# Altium PCB PEAK_PDB.PcbDoc
Units mil, origin at the board's own origin, x right, y up, seen from the top; angles counter-clockwise.
Board outline 3000 x 3300 mil, 4 copper layers (Top Layer, Layer 1 (GND), Layer 2 (Vcc), Bottom Layer), stack 23.756 mil thick; 74 components, 66 nets, 244 pads, 46 vias.
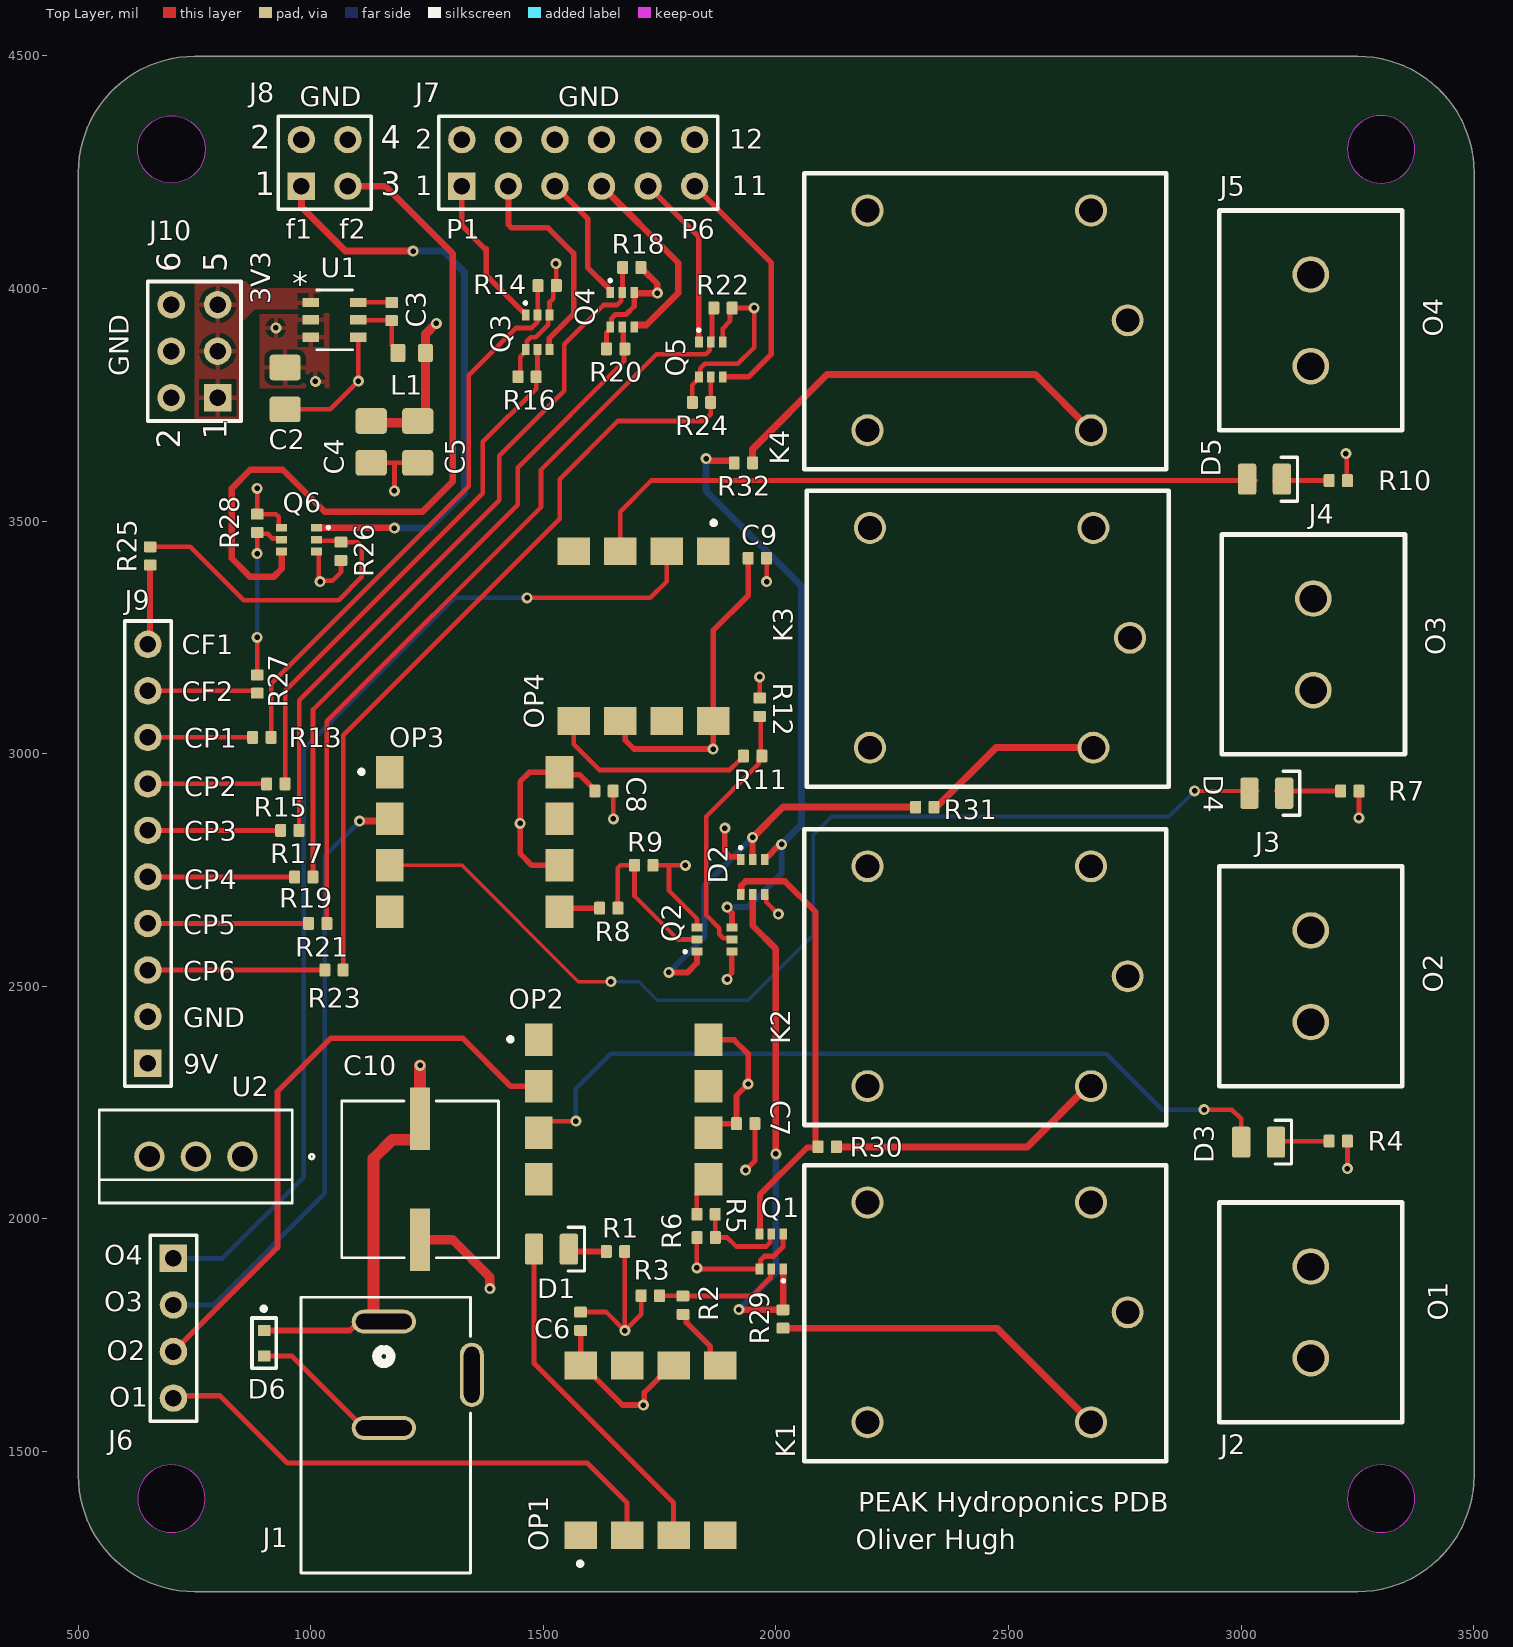
[diagram p0: Top Layer view]
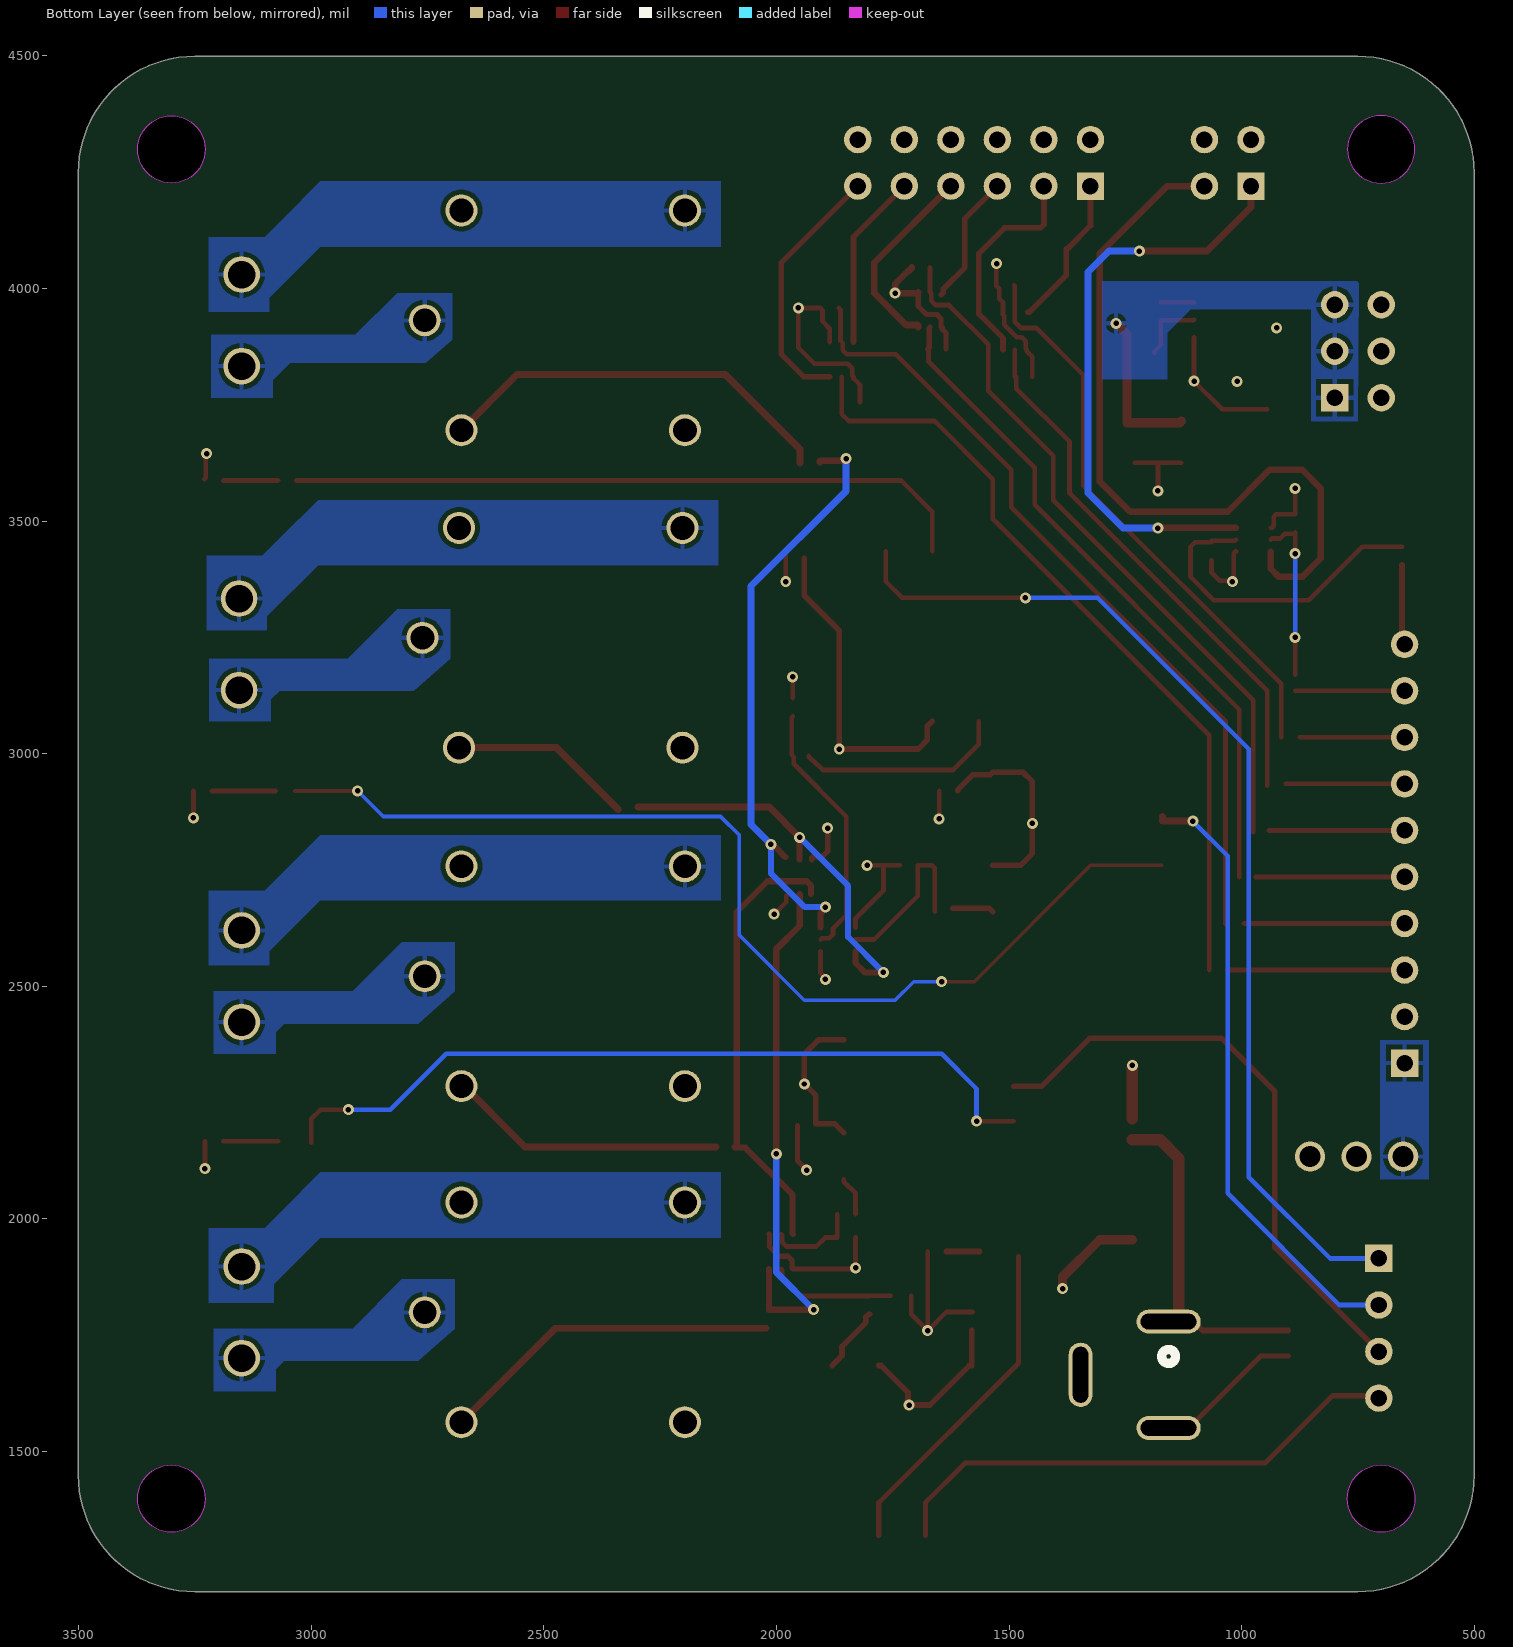
[diagram p1: Bottom Layer view, seen from below]
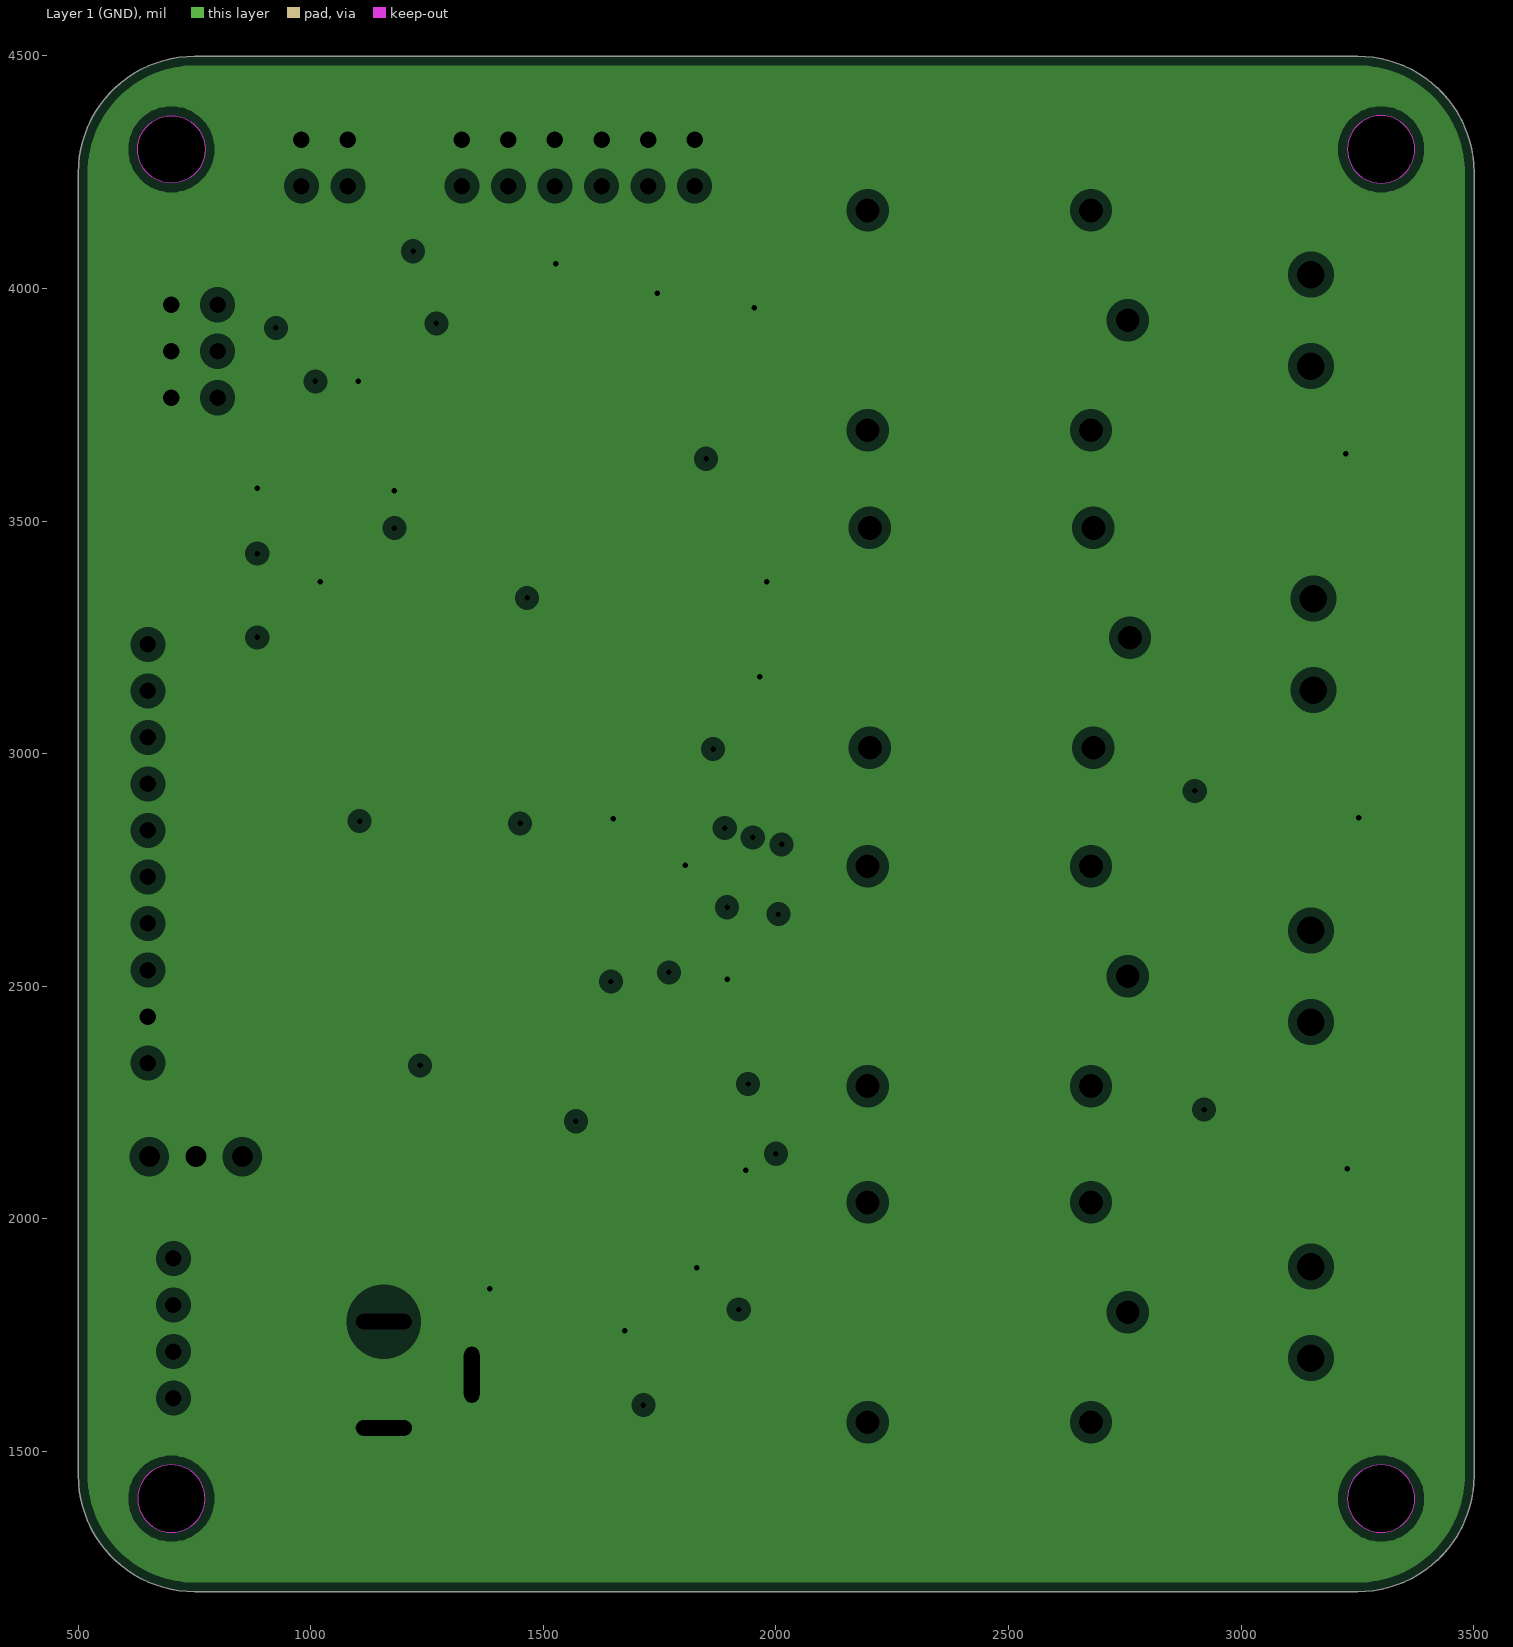
[diagram p2: Layer 1 (GND), clearances drawn from the general rule]
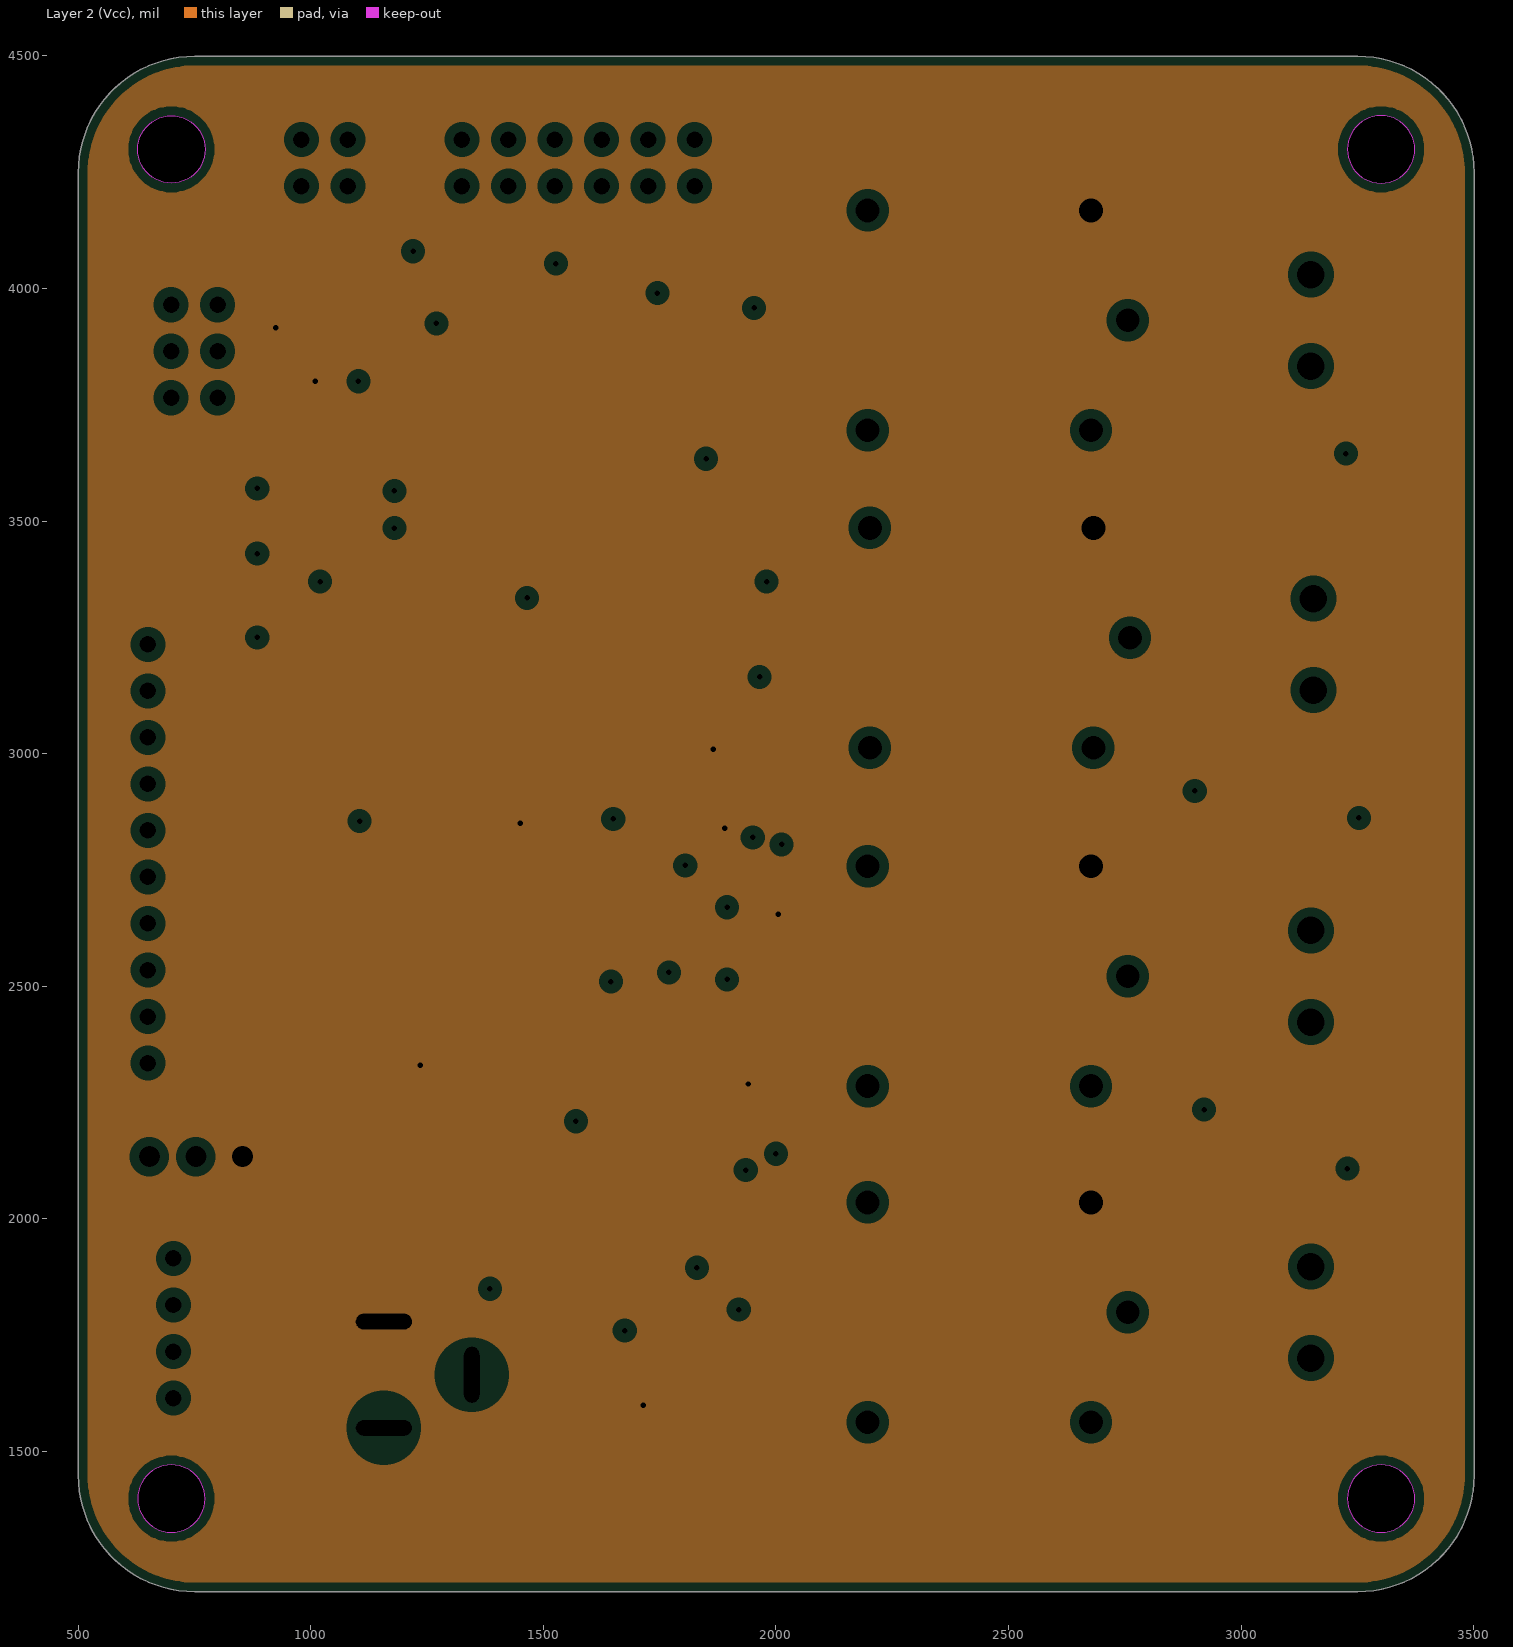
[diagram p3: Layer 2 (Vcc), clearances drawn from the general rule]
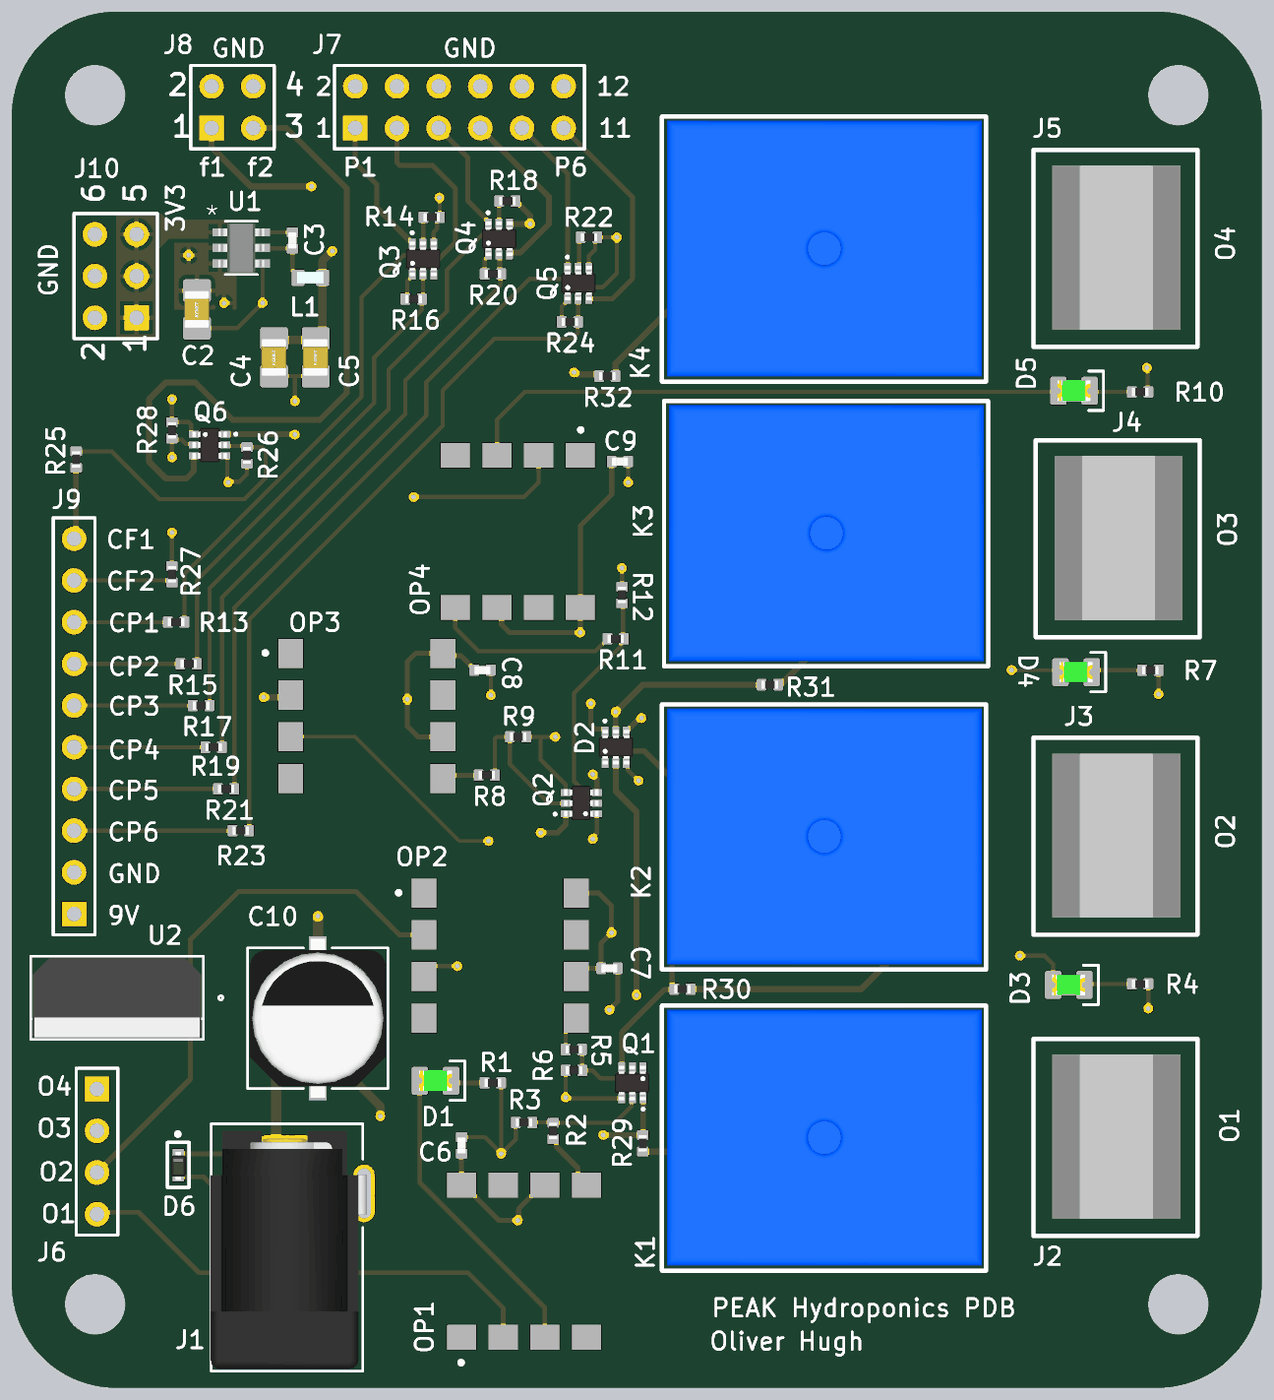
[diagram p4: 3D render of the assembled board from above, using the file's embedded part models]

## Layer stack, top to bottom
Top Solder: solder mask 0.4, Solder Resist, Dk 3.5
Top Layer: signal copper 1.4
Dielectric 2: prepreg 2.8, PP-006, Dk 4.1
Layer 1 (GND): plane copper 1.378, net GND
Dielectric 1: dielectric 12.6, FR-4, Dk 4.8
Layer 2 (Vcc): plane copper 1.378, net +12VDC
Dielectric 3: prepreg 2.8, PP-006, Dk 4.1
Bottom Layer: signal copper 1.4
Bottom Solder: solder mask 0.4, Solder Resist, Dk 3.5

## Board outline
500.5,1448.84 ccw(c750.5,1448.84) 750.5,1198.84 3250.5,1198.84 ccw(c3250.5,1448.84) 3500.5,1448.84 3500.5,4248.84 ccw(c3250.5,4248.84) 3250.5,4498.84 750.5,4498.84 ccw(c750.5,4248.84) 500.5,4248.84
cut-out: 628,1398.84 ccw(c700.5,1398.84) 700.5,1326.34 ccw(c700.5,1398.84) 773,1398.84 ccw(c700.5,1398.84) 700.5,1471.34 ccw(c700.5,1398.84)
cut-out: 3228,1398.84 ccw(c3300.5,1398.84) 3300.5,1326.34 ccw(c3300.5,1398.84) 3373,1398.84 ccw(c3300.5,1398.84) 3300.5,1471.34 ccw(c3300.5,1398.84)
cut-out: 3228,4298.84 ccw(c3300.5,4298.84) 3300.5,4226.34 ccw(c3300.5,4298.84) 3373,4298.84 ccw(c3300.5,4298.84) 3300.5,4371.34 ccw(c3300.5,4298.84)
cut-out: 700.5,4226.34 cw(c700.5,4298.84) 628,4298.84 cw(c700.5,4298.84) 700.5,4371.34 cw(c700.5,4298.84) 773,4298.84 cw(c700.5,4298.84)

## Design rules (kind name [scope] priority, off if disabled: settings)
Clearance [All] p1: gap=10 ignorepadtopadclearanceinfootprint=FALSE except(0: Arc-Hole Track-Hole SMDPad-Hole THPad-Hole Via-Hole Fill-Hole Poly-Hole Region-Hole Text-Hole; 5.04: SMDPad-SMDPad; 5.51: Arc-Arc Arc-Track Track-Track; 7.09: SMDPad-Text; 9.84: Arc-SMDPad Track-SMDPad; 10.04: Arc-Via Track-Via; 13.78: Arc-THPad Track-THPad; 21.65: THPad-THPad)
HoleSize [All] p1: absolutevalues=TRUE maxlimit=248.03 minlimit=1 maxpercent=80.000 minpercent=20.000
MinimumSolderMaskSliver [All] p1: minsoldermaskwidth=4.33
PlaneClearance [All] p1: clearance=20
PlaneConnect [All] p1: planeconnectstyle=Relief reliefexpansion=20 reliefentries=4 reliefconductorwidth=10 reliefairgap=10
PolygonConnect [All] p1: connectstyle=Relief reliefconductorwidth=10 reliefentries=4 polygonreliefangle="90 Angle" airgapwidth=10
RoutingVias [All] p1: holewidth=11.81 width=15.75 viastyle="Through Hole" minholewidth=7.87 minwidth=9.84 maxholewidth=248.03 maxwidth=50
SilkToSolderMaskClearance [IsPad] p1: minsilkscreentomaskgap=5.91 clearancetoexposedcopper=TRUE
SolderMaskExpansion [All] p1: expansion=1.77 istentingtop=FALSE
Width [All] p1: maxlimit=30 minlimit=5.5 preferedwidth=10
25 further rules are at their usual default settings.

## Classes and differential pairs
component class DC_Power_Regulation: C2 C3 C4 C5 C10 D6 J1 J7 J8 J9 J10 L1 Q3 Q4 Q5 Q6 R13 R14 R15 R16 R17 R18 R19 R20 R21 R22 R23 R24 R25 R26 R27 R28 U1 U2
component class AC_Power_Management: C6 C7 C8 C9 D1 D2 D3 D4 D5 D? J2 J3 J4 J5 J6 K1 K2 K3 K4 OP1 OP2 OP3 OP4 Q1 Q2 R1 R2 R3 R4 R5 R6 R7 R8 R9 R10 R11 R12 R29 R30 R31 R32

## Components (designator, comment, footprint, x,y, rotation, side; value= is the part's Value field where it differs from the comment)
C2 "10u" CAP_0805 945,3785 r90 top
C3 "100n" CAP_0402 1174,3950.31 r90 top
C4 "22u" CAP_0805 1130,3670 r90 top
C5 "22u" CAP_0805 1230,3670 r90 top
C6 "100n" CAP_0402 1580,1780 r90 top
C7 "100n" CAP_0402 1934.84,2204.84 r0 top
C8 "100n" CAP_0402 1630.31,2920 r0 top
C9 "100n" CAP_0402 1960,3420 r0 top
C10 "100u" CAP_EEH-ZA1V151P_PAN 1235,2085 r90 top
D1 "GREEN" LED_0805_GREEN 1517.4,1935 r180 top
D2 "BAT54CDW-7-F" SOT-363 1950,2735 r0 top
D3 "GREEN" LED_0805_GREEN 3037.4,2165 r180 top
D4 "GREEN" LED_0805_GREEN 3055,2915 r180 top
D5 "GREEN" LED_0805_GREEN 3050,3590 r180 top
D6 "15Vrwm" SOD523 900,1760.12 r270 top
J1 "694106301002" 694106301002 1230,1665 r90 top
J2 "Terminal Block" 25-E400-02 3149.61,1799.21 r270 top
J3 "Terminal Block" 25-E400-02 3149.61,2521.61 r270 top
J4 "Terminal Block" 25-E400-02 3155,3235 r270 top
J5 "Terminal Block" 25-E400-02 3149.61,3931.42 r270 top
J6 "Header 4" HDR1X4 705,1915 r270 top
J7 "Header 6X2" HDR2X6 1325,4220 r0 top
J8 "Header 2X2" HDR2X2 980,4220 r0 top
J9 "Header 10" HDR1X10 650,2335 r90 top
J10 "Header 3X2" HDR2X3 800,3765 r90 top
K1 "SRD-12VDC-S L-A" "SRD-12VDC-S L" 2196.85,2035.43 r0 top
K2 "SRD-12VDC-S L-A" "SRD-12VDC-S L" 2196.85,2757.83 r0 top
K3 "SRD-12VDC-S L-A" "SRD-12VDC-S L" 2201.85,3485.24 r0 top
K4 "SRD-12VDC-S L-A" "SRD-12VDC-S L" 2196.85,4167.64 r0 top
L1 "4u7" IND_0603 1217,3861 r0 top
OP1 "6N136SMT/R" SOP-8-2.54MM 1580,1320 r90 top
OP2 "6N136SMT/R" SOP-8-2.54MM 1490.04,2385 r0 top
OP3 "6N136SMT/R" SOP-8-2.54MM 1170,2960 r0 top
OP4 "6N136SMT/R" SOP-8-2.54MM 1865,3435 r270 top
Q1 "NTJD5121NT1G" SOT-363 1990,1930 r180 top
Q2 "NTJD5121NT1G" SOT-363 1867.6,2600.59 r90 top
Q3 "NTJD5121NT1G" SOT-363 1487.49,3905.75 r0 top
Q4 "NTJD5121NT1G" SOT-363 1669.67,3953.97 r0 top
Q5 "NTJD5121NT1G" SOT-363 1860,3847.4 r0 top
Q6 "NTJD5121NT1G" SOT-363 975,3460 r270 top
R1 "50R" RES_0402 1655,1930 r180 top
R2 "1k" RES_0402 1800,1814.69 r90 top
R3 "10k" RES_0402 1730,1835 r0 top
R4 "50R" RES_0402 3208.66,2167.28 r180 top
R5 "1k" RES_0402 1849.69,2010 r0 top
R6 "10k" RES_0402 1850,1960 r0 top
R7 "50R" RES_0402 3233.35,2919.69 r180 top
R8 "1k" RES_0402 1640.63,2668.03 r0 top
R9 "10k" RES_0402 1715.63,2760 r180 top
R10 "50R" RES_0402 3208.66,3587.09 r180 top
R11 "1k" RES_0402 1950,2995 r0 top
R12 "10k" RES_0402 1965,3100 r270 top
R13 "1k" RES_0402 895,3035 r0 top
R14 "10k" RES_0402 1508.21,4006.15 r180 top
R15 "1k" RES_0402 925,2935 r0 top
R16 "10k" RES_0402 1465,3810 r0 top
R17 "1k" RES_0402 955,2835 r0 top
R18 "10k" RES_0402 1690,4045 r180 top
R19 "1k" RES_0402 985,2735 r0 top
R20 "10k" RES_0402 1655.31,3870 r0 top
R21 "1k" RES_0402 1015,2635 r0 top
R22 "10k" RES_0402 1886,3958 r180 top
R23 "1k" RES_0402 1050,2535 r0 top
R24 "10k" RES_0402 1840,3755 r0 top
R25 "1k" RES_0402 655,3425 r90 top
R26 "10k" RES_0402 1065,3435 r90 top
R27 "1k" RES_0402 885,3149.69 r90 top
R28 "10k" RES_0402 885,3495 r270 top
R29 "0R" RES_0402 2015,1785 r270 top
R30 "0R" RES_0402 2110,2155 r0 top
R31 "0R" RES_0402 2320,2885 r0 top
R32 "0R" RES_0402 1930,3625 r0 top
U1 "3.3V Switch Reg" AP63203WU-7 1051.25,3932.4 r0 top
U2 "9V Lin Reg 1A" MC7809CTG 753,2134 r180 top

## Footprints (in the part's own frame and the unit in brackets; to place one, negate y for a bottom-side part, rotate by r counter-clockwise, add the part's x,y. Pads: shape width x height; smd on the part's side, far side on the other; paste and mask are expansions set on the pad)
25-E400-02 [mm] "NTE Electronics, Inc TERMINAL BLOCK EUROSTYLE2 Position Wire to Board Terminal Block Horizontal with Board 0.197\" (5.00mm) Through Hole"
  round 2 hole 1.5: 1(-2.5,0) 2(2.5,0)
  silkscreen extent -6,-5 6,5, body extent -5.04,-3.85 4.97,3.95, height 10.02
694106301002 [mm] "CONN PWR JACK 2.1X5.5MM SOLDER"
  oval 1.308x3.508 hole 0.85 slot 3.05 at 90 deg: 1(2.9,1.85) 2(-2.9,1.85)
  oval 3.508x1.308 hole 0.85 slot 3.05 at 0 deg: 3(0,-2.95)
  silkscreen extent -10.83,-2.87 4.24,6.37, body extent -10.69,-3.1 3.81,6.4, height 10.71
AP63203WU-7 [mil]
  rect 35.5x20 smd paste+0 mask+0: 1(-51.25,37.4) 2(-51.25,0) 3(-51.25,-37.4) 4(51.25,-37.4) 5(51.25,0) 6(51.25,37.4)
  silkscreen extent -38,-64 38,64, body extent -55,-59 55,59, height 39
CAP_0402 [mm]
  rrect25% 0.6x0.7 smd: 1(-0.5,0) 2(0.5,0)
  body extent -0.5,-0.26 0.5,0.26, height 0.37
CAP_0805 [mm]
  rrect25% 1.4x1.7 smd: 1(-1.143,0) 2(1.143,0)
  body extent -1.15,-0.76 1.15,0.79, height 1.01
CAP_EEH-ZA1V151P_PAN [mil]
  rect 134x43 smd paste+0 mask+0: 1(-130,0) 2(130,0)
  silkscreen extent -168,-168 168,168, body extent -191,-163 191,163, height 402
HDR1X4 [mm] "Connector; Header; 4 Position"
  rect 1.5x1.5 hole 0.9: 1(0,0)
  round 1.5 hole 0.9: 2(2.54,0) 3(5.08,0) 4(7.62,0)
  silkscreen extent -1.27,-1.27 8.89,1.27
HDR1X10 [mm] "Connector; Header; 10 Position"
  rect 1.5x1.5 hole 0.9: 1(0,0)
  round 1.5 hole 0.9: 2(2.54,0) 3(5.08,0) 4(7.62,0) 5(10.16,0) 6(12.7,0) 7(15.24,0) 8(17.78,0) 9(20.32,0) 10(22.86,0)
  silkscreen extent -1.27,-1.27 24.13,1.27
HDR2X2 [mm] "Connector; Header; 2x2 Position"
  rect 1.5x1.5 hole 0.9: 1(0,0)
  round 1.5 hole 0.9: 2(0,2.54) 3(2.54,0) 4(2.54,2.54)
  silkscreen extent -1.27,-1.27 3.81,3.81
HDR2X3 [mm] "Connector; Header; 3x2 Position"
  rect 1.5x1.5 hole 0.9: 1(0,0)
  round 1.5 hole 0.9: 2(0,2.54) 3(2.54,0) 4(2.54,2.54) 5(5.08,0) 6(5.08,2.54)
  silkscreen extent -1.27,-1.27 6.35,3.81
HDR2X6 [mm] "Connector; Header; 6x2 Position"
  rect 1.5x1.5 hole 0.9: 1(0,0)
  round 1.5 hole 0.9: 2(0,2.54) 3(2.54,0) 4(2.54,2.54) 5(5.08,0) 6(5.08,2.54) 7(7.62,0) 8(7.62,2.54) 9(10.16,0) 10(10.16,2.54) 11(12.7,0) 12(12.7,2.54)
  silkscreen extent -1.27,-1.27 13.97,3.81
IND_0603 [mm]
  rrect25% 0.8x1 smd: 1(-0.75,0) 2(0.75,0)
  body extent -0.81,-0.37 0.81,0.37, height 0.87
LED_0805_GREEN [mm]
  rrect25% 1x1.7 smd: A(0.95,0) K(-0.95,0)
  silkscreen extent -1.8,-1.2 -0.9,1.2, body extent -1,-0.63 1,0.63, height 1.12
MC7809CTG [mil] "IC REG LINEAR 9V 1A TO220AB"
  round 65 / inner round 60 / far side round 65 hole 45 paste-32.5 mask+0: 1(-100,0) 2(0,0) 3(100,0)
  silkscreen extent -254,-100 208,100, body extent -203,-95 203,95, height 665
RES_0402 [mm]
  rrect25% 0.6x0.7 smd: 1(-0.5,0) 2(0.5,0)
  body extent -0.5,-0.25 0.5,0.25, height 0.3
SOD523 [mm]
  rect 0.6x0.7 smd: 1(0,0) 2(1.4,0)
  silkscreen extent -1.3,-0.66 2.06,0.66, body extent -0.11,-0.44 1.59,0.46, height 0.7
SOP-8-2.54MM [mm]
  rect 1.52x1.78 smd mask+0.05: 1(0,0) 2(0,-2.54) 3(0,-5.08) 4(0,-7.62) 5(9.27,-7.62) 6(9.27,-5.08) 7(9.27,-2.54) 8(9.27,0)
  silkscreen extent -1.65,-0.08 -1.44,0.13, body extent -0.53,-8.74 9.77,1.02, height 4.31
SOT-363 [mm]
  rect 0.42x0.6 smd: 1(-0.65,0.95) 2(0,0.95) 3(0.65,0.95) 4(0.65,-0.95) 5(0,-0.95) 6(-0.65,-0.95)
  silkscreen extent -0.69,1.57 -0.64,1.63, body extent -1.04,-1.04 1.06,1.06, height 0.95
"SRD-12VDC-S L" [mm] "Mechanical Relay"
  round 1.75 hole 1.3: 1(0,0) 2(12.2,-12) 3(14.2,-6) 4(12.2,0) 5(0,-12)
  silkscreen extent -3.45,-14.12 16.31,2.03, body extent -3.15,-13.82 16.05,1.78, height 15.81

## Part data
C2 C4 C5: library part CAP_0805
C3 C6 C7 C8 C9: library part CAP_0402
C10: library part CAP_EEH-ZA1V151P_PAN
D1 D3 D4 D5: library part LED_0805_GREEN, "LED 0805 GREEN SMD"
D2: "2 Pairs of Common Cathode Diodes in SOT363 Package BAT54CDW-7-F"
D6: library part PESD15VS1UB,115, "ESD protection (TVS) diode in SOD523 package"
J1: library part "Header 3", "Header, 3-Pin", LatestRevisionDate=17-Jul-2002, LatestRevisionNote="Re-released for DXP Platform.", Publisher="Altium Limited"
J2 J3 J4 J5: library part "Header 2", "Header, 2-Pin", LatestRevisionDate=17-Jul-2002, LatestRevisionNote="Re-released for DXP Platform.", Publisher="Altium Limited"
J6: "Header, 4-Pin", LatestRevisionDate=17-Jul-2002, LatestRevisionNote="Re-released for DXP Platform.", Publisher="Altium Limited"
J7: "Header, 6-Pin, Dual row", LatestRevisionDate=17-Jul-2002, LatestRevisionNote="Re-released for DXP Platform.", Publisher="Altium Limited"
J8: "Header, 2-Pin, Dual row", LatestRevisionDate=17-Jul-2002, LatestRevisionNote="Re-released for DXP Platform.", Publisher="Altium Limited"
J9: "Header, 10-Pin", LatestRevisionDate=17-Jul-2002, LatestRevisionNote="Re-released for DXP Platform.", Publisher="Altium Limited"
J10: "Header, 3-Pin, Dual row", LatestRevisionDate=17-Jul-2002, LatestRevisionNote="Re-released for DXP Platform.", Publisher="Altium Limited"
L1: library part IND_0603, "Inductor SMD 0603"
OP1 OP2 OP3 OP4: "Optocouplers SMD-8 RoHS. SOP-8-2.54mm Package"
Q1 Q2 Q3 Q4 Q5 Q6: "2 NMOSFETs SOT-363"
R1 R2 R3 R4 R5 R6 R7 R8 R9 R10 R11 R12 R13 R14 R15 R16 R17 R18 R19 R20 R21 R22 R23 R24 R25 R26 R27 R28 R29 R30 R31 R32: library part RES_0402, "Resistor SMD 0402 (0.0625W)"
U1: library part AP63203WU-7, "IC REG BUCK 3.3V 2A TSOT23-6"
U2: library part MC7809CTG, "IC REG LINEAR 9V 1A TO220AB"

## Via types
v1: diameter 23.62, hole 11.81, Top Layer to Bottom Layer, 46 vias

## Nets (pads, with @x,y where several pads share a name; then routed paths per layer and width w, separated by ;. In a path a pad name is that pad's centre, name@x,y a point inside that pad or via, vN(x,y) a via of type N, cw(c..) or ccw(c..) an arc to the next point about the centre after c; other vN are vias at no path point)
3V3: C4.2 C5.2 J10.1 J10.3 J10.5 L1.2 U1.1 | length 341.2
  Top Layer w20: C4.2 1133.47,3711.53 1246.53,3711.53 L1.2 1246.53,3901.53 v1(1270,3925)
+9VDC: J9.1 U2.3
+12VDC: C2.2 C6.1 C7.1 C8.1 C9.1 C10.2 D2.1 D2.4 D6.1 J1.1 K1.4 K2.4 K3.4 K4.4 OP1.6 OP1.8 OP2.6 OP2.8 OP3.6 OP3.8 OP4.6 OP4.8 U1.2 U1.3 U2.1 | length 2756.2
  Top Layer w10: D2.4@1978.86,2694.33 1978.86,2681.14 v1(2005,2655)
  Top Layer w12: D6.1 1084.12,1760.12 J1.1@1103.17,1779.17 ; OP3.6 1475,2760 1450,2785 v1(1450,2850) 1450,2940 1470,2960 OP3.8 1540.08,2954.88 1577.72,2954.88 1610.63,2921.97 C8.1 ; C6.1 OP1.8 1585.12,1684.96 1670.08,1600 v1(1715,1600) 1717.22,1602.22 1717.22,1627.3 1774.88,1684.96 OP1.6 ; OP4.6 1675.85,3059.19 1675.85,3029.15 1695,3010 v1(1865,3010) OP4.8 1865,3265 1940.31,3340.31 C9.1 ; OP2.6 1874.84,2204.84 C7.1 1915.16,2265.16 v1(1940,2290) 1940,2355 1910,2385 OP2.8 ; v1(1890,2840) 1890,2790 1901.79,2778.21 1922.14,2778.21 1924.41,2775.94 D2.1
  Top Layer w25: J1.1 1153.24,1779.17 1135,1797.42 1135,2130 1175,2170 C10.2@1235,2170 ; C10.2 v1(1235,2330)
  other v1: 1010,3800 925,3915
AC_Load1_In: J2.1 K1.1
AC_Load1_Out: J2.2 K1.3
AC_Load2_In: J3.1 K2.1
AC_Load2_Out: J3.2 K2.3
AC_Load3_In: J4.1 K3.1
AC_Load3_Out: J4.2 K3.3
AC_Load4_In: J5.1 K4.1
AC_Load4_Out: J5.2 K4.3
ds_fan1: J9.10 R25.1 | length 175.3
  Top Layer w13: J9.10@655,3230 R25.1
ds_fan2: J9.9 R27.1 | length 235
  Top Layer w10: J9.9 R27.1@885,3135
ds_pp1: J9.8 R13.1 | length 225
  Top Layer w10: J9.8 R13.1@875,3035
ds_pp2: J9.7 R15.1 | length 255
  Top Layer w10: J9.7 R15.1@905,2935
ds_pp3: J9.6 R17.1 | length 291.5
  Top Layer w10: J9.6 R17.1@941.51,2835
ds_pp4: J9.5 R19.1 | length 320
  Top Layer w10: J9.5 R19.1 R19.1@970,2735
ds_pp5: J9.4 R21.1 | length 345
  Top Layer w10: J9.4 R21.1@995,2635
ds_pp6: J9.3 R23.1 | length 380
  Top Layer w10: J9.3 R23.1@1030,2535
fan1+: J8.1 Q6.1 | length 1276.9
  Top Layer w14: Q6.1 1012.7,3485.3 1179.7,3485.3 v1(1180,3485)
  Top Layer w15: J8.1 980,4175 1075,4080 v1(1220,4080)
  Bottom Layer w15: v1(1180,3485) 1255,3485 1330,3560 1330,4035 1285,4080 v1(1220,4080)
fan2+: J8.3 Q6.4 | length 1649.1
  Top Layer w14: Q6.4 937.6,3397.6 920,3380 870,3380 830,3420 830,3570 870,3610 940,3610 1030,3520 1240,3520 1305,3585 1305,4075 1160,4220 J8.3
GND: C2.1 C4.1 C5.1 C6.2 C7.2 C8.2 C9.2 C10.1 D6.2 J1.2 J1.3 J7.2 J7.4 J7.6 J7.8 J7.10 J7.12 J8.2 J8.4 J9.2 J10.2 J10.4 J10.6 Q1.3 Q1.6 Q2.3 Q2.6 Q3.3 Q3.6 Q4.3 Q4.6 Q5.3 Q5.6 Q6.3 Q6.6 R1.1 R3.1 R4.1 R6.1 R7.1 R9.1 R10.1 R12.1 R14.1 R16.1 R18.1 R20.1 R22.1 R24.1 R26.1 R28.1 U1.4 U2.2 | length 3639.7
  Top Layer w10: v1(885,3570) R28.1 925.28,3514.69 931.14,3508.83 931.14,3488.86 934.41,3485.59 Q6.6 ; C2.1 1042,3740 v1(1102.5,3800.5) U1.4 ; Q6.3 1014.13,3434.41 1017.39,3431.14 1017.39,3372.61 v1(1020,3370) 1021.81,3371.81 1046.81,3371.81 1065,3390 R26.1 ; C4.1 1180,3625 ; v1(1180,3565) 1180,3625 ; C5.1 1180,3625 ; R16.1@1450,3810 1450,3852.9 1461.9,3864.8 Q3.6 1464.38,3870.83 1464.38,3886.31 1473.07,3895 1483.28,3895 1510.6,3922.32 1510.6,3940.67 Q3.3 1513.08,3969.96 1521.09,3977.97 1521.09,3999.34 R14.1 1527.4,4006.65 1527.4,4052.65 v1(1526.9,4053.15) ; C6.2@1577.89,1800 1635,1800 v1(1675,1760) ; v1@1650.16,2860.16 C8.2@1650.16,2919.84 ; R1.1@1675,1930 v1(1675,1760) ; R3.1 1710.31,1795.31 v1(1675,1760) ; R9.1 1770,2760 ; v1(1805,2760) 1770,2760 ; R24.1 1820.31,3792.36 1834.41,3806.46 Q5.6 1836.89,3812.48 1836.89,3827.96 1847.08,3838.15 1918.15,3838.15 1953,3873 v1(1953,3958) R22.1 1901.04,3953.35 1901.04,3929.22 1885.59,3913.78 Q5.3 ; v1(1830,1895) R6.1@1830,1960 ; Q2.3 1830.2,2644.8 1770,2705 1770,2760 ; R12.1 v1(1965,3165) ; v1@1980,3375.42 C9.2@1980,3425.42 ; v1(3225,3645) 3226.67,3643.33 3226.67,3593.33 R10.1@3230,3590 ; v1(3228.35,2108.35) R4.1 ; v1(3253.03,2861.97) R7.1
  Top Layer w11: D6.2 959.69,1705 1113.86,1550.83 J1.2 ; R20.1 1635.63,3904.57 1644.08,3913.02 Q4.6 ; Q4.6@1645.56,3918.04 1646.06,3918.54 1646.06,3934.73 1655.05,3943.72 1677.42,3943.72 1695.26,3961.56 1695.26,3991.27 Q4.3 ; v1@1830,1892.6 Q1.3 1966.39,1894.58 1966.39,1910.76 1975.38,1919.75 1994.75,1919.75 2015,1940 2015,1966.81 Q1.6 ; v1(1895,2515) 1895,2518.42 1905,2528.42 Q2.6 ; v1(1935,2105) 1955,2125 C7.2@1955,2201.18
  Top Layer w12: Q4.6 Q4.6@1645.56,3918.04
  Top Layer w14: Q4.3@1695.26,3991.27 1696.53,3990 v1(1745,3990) 1744.68,3990.31 1744.68,4010.01 1716.46,4038.22 1714.5,4038.22 1709.69,4043.03 R18.1
  Top Layer w20: C10.1 1305,1955 1385,1875 v1@1385,1851.67
  other v1: 1385,1850 1650.31,2860 1980,3370
NetC3_1: C3.1 L1.1 U1.5 | length 147.4
  Top Layer w10: U1.5 1103.39,3931.52 1173.11,3931.52 C3.1 1174,3878.41 1187.47,3864.94 L1.1
NetC3_2: C3.2 U1.6 | length 71.6
  Top Layer w10: U1.6 1102.6,3969.9 1173.9,3969.9 C3.2
NetD1_A: D1.A OP1.3 | length 723.6
  Top Layer w11: D1.A@1480,1919.32 1480,1690 1780,1390 OP1.3
NetD1_K: D1.K R1.2 | length 72.3
  Top Layer w12: D1.K@1563.03,1930 R1.2
NetD2_2: D2.2 Q2.1 R31.1 | length 879.9
  Top Layer w13: v1(1770,2530) 1810,2530 1830,2550 1830,2574.8 Q2.1 ; D2.2 v1(1950,2820)
  Top Layer w15: v1(1950,2820) 2015,2885 R31.1@2297.41,2885
  Bottom Layer w13: v1(1770,2530) 1846,2606 1846,2716 v1(1950,2820)
NetD2_3: D2.3 Q2.4 R32.1 | length 1291.3
  Top Layer w13: v1(1895,2670) 1895,2667.13 1905,2657.13 Q2.4 ; D2.3@1980.9,2777.71 2006.16,2802.97 2009.97,2802.97 v1(2012,2805)
  Top Layer w15: v1(1850,3633.94) 1852.33,3633.94 1856.68,3629.59 1906,3629.59 R32.1@1906,3627.34
  Bottom Layer w13: v1(1895,2670) 1939,2670 2012,2743 v1(2012,2805)
  Bottom Layer w15: v1(1850,3633.94) 1850,3565 2055,3360 2055,2848 v1(2012,2805)
NetD2_5: D2.5 Q1.1 R29.1 | length 1129.5
  Top Layer w13: R29.1@2015.59,1804.69 Q1.1
  Top Layer w14: v1(1920,1805) 1920.16,1804.84 2014.84,1804.84 R29.1 ; D2.5 1950,2630 2000,2580 v1(2000,2140)
  Bottom Layer w14: v1(1920,1805) 2000,1885 v1(2000,2140)
NetD2_6: D2.6 Q1.4 R30.1 | length 966.1
  Top Layer w13: D2.6@1925.39,2698.58 1925.39,2716.18 1934.96,2725.75 2019.25,2725.75 2085.31,2659.68 R30.1@2085.31,2155 ; Q1.4 1965.39,1968.38 1965.39,2051.89 2066.69,2153.19 2088.51,2153.19 R30.1
NetD3_A: D3.A OP2.3 | length 1720.5
  Top Layer w10: OP2.3@1490,2210 v1(1570,2210) ; v1(2920,2235) 2980,2235 3000,2215 D3.A@3000,2163.58
  Bottom Layer w10: v1(1570,2210) 1570,2280 1645,2355 2710,2355 2830,2235 v1(2920,2235)
NetD3_K: D3.K R4.2 | length 118.1
  Top Layer w10: D3.K@3070.87,2167.28 R4.2
NetD4_A: D4.A OP3.3 | length 2295.3
  Top Layer w8: OP3.3@1172.45,2760 1325,2760 1575,2510 v1(1645,2510) ; v1(2900,2920) D4.A@3035.31,2920
  Bottom Layer w8: v1(1645,2510) 1705,2510 1745,2470 1940,2470 2080,2610 2080,2825 2120,2865 2845,2865 v1(2900,2920)
NetD4_K: D4.K R7.2 | length 137.8
  Top Layer w10: D4.K@3075.87,2919.69 R7.2
NetD5_A: D5.A OP4.3 | length 1479.3
  Top Layer w10: OP4.3 1665,3520 1732.09,3587.09 D5.A@3031.5,3587.09
NetD5_K: D5.K R10.2 | length 118.1
  Top Layer w10: D5.K@3070.87,3587.09 R10.2
NetK1_2: K1.2 R29.2 | length 737.9
  Top Layer w15: R29.2@2022.92,1765 2475.16,1765 K1.2
NetK2_2: K2.2 R30.2 | length 606.5
  Top Layer w15: R30.2 2540,2155 K2.2@2678.75,2293.75
NetK3_2: K3.2 R31.2 | length 397.2
  Top Layer w15: R31.2@2340,2880 2472.8,3012.8 K3.2
NetK4_2: K4.2 R32.2 | length 873.3
  Top Layer w15: R32.2@1949.37,3625 1949.37,3654.37 2110,3815 2557.36,3815 K4.2
NetOP1_5: OP1.5 R2.1 | length 144.3
  Top Layer w12: R2.1 1801.85,1795 1807.66,1789.19 1807.66,1777.34 1859.15,1725.85 1859.15,1705.81 OP1.5
NetOP2_5: OP2.5 R5.1 | length 85.4
  Top Layer w10: R5.1 1830,2054.88 1855,2079.88 OP2.5
NetOP3_5: OP3.5 R8.1 | length 89.3
  Top Layer w12: OP3.5 1542.99,2668.03 R8.1
NetOP4_5: OP4.5 R11.1 | length 451.7
  Top Layer w10: OP4.5 1565,3020 1620,2965 1900.31,2965 1921.54,2986.22 1923.5,2986.22 1930.31,2993.03 R11.1
Outlet1: J6.4 OP1.2 | length 1142.3
  Top Layer w11: J6.4 710,1620 805,1620 950,1475 1595,1475 1680,1390 OP1.2
Outlet2: J6.3 OP2.2 | length 1303.2
  Top Layer w12: J6.3 928.61,1938.61 928.61,2273.61 1043.61,2388.61 1326.39,2388.61 1430,2285 OP2.2
Outlet3: J6.2 OP3.2 | length 1330.6
  Top Layer w15: v1(1105,2855) 1169.88,2855 1170,2854.88 OP3.2@1170,2865
  Bottom Layer w10: J6.2 790,1815 1030,2055 1030,2780 v1(1105,2855)
Outlet4: J6.1 OP4.2 | length 2266.6
  Top Layer w10: v1(1465,3335) 1730,3335 1765,3370 OP4.2
  Bottom Layer w10: J6.1 810,1915 985,2090 985,3010 1310,3335 v1(1465,3335)
pp1+: J7.1 Q3.1 | length 327.9
  Top Layer w12: J7.1 1325,4135 1375,4085 ; 1376.9,4085 1376.9,4028.46 1456.4,3948.96 Q3.1@1459.63,3948.96
pp2+: J7.3 Q3.4 | length 476.8
  Top Layer w12: J7.3 1425,4137.03 1432.03,4130 1510,4130 1565,4075 1565,3945.06 1513.08,3893.14 Q3.4
pp3+: J7.5 Q4.1 | length 283.2
  Top Layer w12: J7.5 1595,4150 1595,4045 1641.81,3998.19 1641.81,3990.5 Q4.1@1645.56,3986.76
pp4+: J7.7 Q4.4 | length 425.6
  Top Layer w14: J7.7 1790,4055 1790,3990 1721.37,3921.37 1696.53,3921.37 1695.26,3920.11 Q4.4
pp5+: J7.9 Q5.1 | length 380.5
  Top Layer w12: J7.9 1834.41,4110.59 Q5.1
pp6+: J7.11 Q5.4 | length 554.1
  Top Layer w12: J7.11 1990,4055 1990,3859 1941,3810 Q5.4
q1a_g: Q1.2 R2.2 R3.2 | length 269.6
  Top Layer w10: R3.2@1755,1835 R2.2@1799.69,1835 ; R2.2@1799.69,1834.69 R2.2 1949.37,1834.37 1988.15,1873.15 1988.15,1890.75 Q1.2
q1b_g: Q1.5 R5.2 R6.2 | length 198.5
  Top Layer w10: R5.2 1869.53,2009.84 1869.53,1960.16 R6.2 1895,1960 1914.25,1940.75 1978.82,1940.75 1987.52,1949.44 1987.52,1964.92 Q1.5
q2a_g: Q2.2 R8.2 R9.2 | length 370.7
  Top Layer w10: R8.2@1660,2660.7 1660,2754.14 1665.86,2760 R9.2 1695.94,2694.06 1789.41,2600.59 Q2.2
q2b_g: Q2.5 R11.2 R12.2 | length 561.1
  Top Layer w10: Q2.5 1902.52,2603.07 1887.04,2603.07 1878.35,2611.77 1878.35,2624.94 1850,2653.28 1850,2865 1962.87,2977.87 1962.87,2992.87 1967.34,2997.34 1967.34,3077.66 1965,3080 R12.2
q3a_g: Q3.2 R13.2 R14.2 | length 1228.8
  Top Layer w10: R13.2@915,3035 915,3150 1340,3575 1340,3813.1 1441.9,3915 1475,3915 1488.01,3928.01 Q3.2@1488.01,3943.67 ; Q3.2 Q3.2@1488.01,3943.67 ; R14.2 1488.01,4005.63 Q3.2@1488.01,3943.67
q3b_g: Q3.5 R15.2 R16.2 | length 1160.9
  Top Layer w10: R15.2@945,2930.99 945,3135 1370,3560 1370,3670 1484.69,3784.69 R16.2 ; R16.2@1487.49,3810 Q3.5
q4a_g: Q4.2 R17.2 R18.2 | length 1519
  Top Layer w10: R17.2@975,2830.87 975,3115 1405,3545 1405,3640 1545,3780 1545,3880 1629.22,3964.22 1658,3964.22 1667.19,3973.41 1667.19,3988.89 Q4.2 1669.99,3991.69 1669.99,4044.68 R18.2
q4b_g: Q4.5 R19.2 R20.2 | length 1462.3
  Top Layer w10: R19.2@1005,2735 1005,3095 1445,3535 1445,3615 1673.33,3843.33 R20.2@1673.33,3871.67
  Top Layer w11: Q4.5 1671.65,3914.58 1671.65,3873.35 1673.33,3871.67 R20.2
q5a_g: Q5.2 R21.2 R22.2 | length 1729.4
  Top Layer w10: R21.2 1034.69,3069.69 1495,3530 1495,3610 1743.15,3858.15 1848.82,3858.15 1857.52,3866.84 1857.52,3882.32 Q5.2 1862.48,3887.28 1862.48,3954.17 R22.2
q5b_g: Q5.5 R23.2 R24.2 | length 1710.3
  Top Layer w10: R23.2@1070,2535 1070,3040 1535,3505 1535,3590 1660,3715 1844.69,3715 1859.69,3730 R24.2 ; R24.2@1860,3755 Q5.5
q6a_g: Q6.2 R25.2 R26.2 | length 690.9
  Top Layer w10: R25.2 740.95,3444.69 855.63,3330 1060,3330 1110,3380 1110,3445 1100.31,3454.69 R26.2 ; Q6.2 1014.88,3457.52 R26.2@1065,3457.52
q6b_g: Q6.5 R27.2 R28.2 | length 364.9
  Top Layer w10: R27.2 v1(885,3250) ; v1(885,3430) R28.2 887.69,3472.62 907.38,3472.62 917.52,3462.48 935.12,3462.48 Q6.5
  Bottom Layer w10: v1(885,3250) v1(885,3430)
pads on no net: K1.5 K2.5 K3.5 K4.5 OP1.1 OP1.4 OP1.7 OP2.1 OP2.4 OP2.7 OP3.1 OP3.4 OP3.7 OP4.1 OP4.4 OP4.7

## Polygon pours and split planes (outlines as drawn)
+9VDC on Bottom Layer "+9VDC_L04_P013" (solid, pour order 13): 597.74,2383.53 701.74,2383.53 701.74,2084.87 597.74,2084.87
3V3 on Bottom Layer "3V3_L04_P012" (solid, pour order 12): 748,4015 1300,4015 1300,3805 1160,3805 1160,3905 1110,3955 850,3955 850,3715 750.07,3715
AC_Load1_Out on Bottom Layer "AC_LOAD1_OUT_L04_P008" (solid, pour order 8): 3076.5,1676.5 3076.5,1630 3209,1630 3209,1764.07 2910.93,1764.07 2805,1870 2691,1870 2691,1764.07 2769.63,1695 3058,1695
AC_Load2_Out on Bottom Layer "AC_LOAD2_OUT_L04_P007" (solid, pour order 7): 3076.5,2401.5 3076.5,2355 3209,2355 3209,2489.07 2910.93,2489.07 2805,2595 2691,2595 2691,2489.07 2769.63,2420 3058,2420
AC_Load3_Out on Bottom Layer "AC_LOAD3_OUT_L04_P006" (solid, pour order 6): 3086.5,3116.5 3086.5,3070 3219,3070 3219,3204.07 2920.93,3204.07 2815,3310 2701,3310 2701,3204.07 2779.63,3135 3068,3135
AC_Load4_Out on Bottom Layer "AC_LOAD4_OUT_L04_P005" (solid, pour order 5): 3082.5,3802.5 3082.5,3765 3215,3765 3215,3900 2905,3900 2815,3990 2697,3990 2697,3890.07 2754,3840 3045,3840
AC_Load3_In on Bottom Layer "AC_LOAD3_IN_L04_P003" (solid, pour order 3): 3065,3465 3105,3425 3225,3425 3225,3265 3095,3265 3095,3295 2985,3405 2125,3405 2125,3545 2985,3545
AC_Load4_In on Bottom Layer "AC_LOAD4_IN_L04_P004" (solid, pour order 4): 3060,4150 3100,4110 3220,4110 3220,3950 3090,3950 3090,3980 2980,4090 2120,4090 2120,4230 2980,4230
AC_Load2_In on Bottom Layer "AC_LOAD2_IN_L04_P002" (solid, pour order 2): 3060,2745 3100,2705 3220,2705 3220,2545 3090,2545 3090,2575 2980,2685 2120,2685 2120,2825 2980,2825
AC_Load1_In on Bottom Layer "AC_LOAD1_IN_L04_P001" (solid, pour order 1): 3060,2020 3100,1980 3220,1980 3220,1820 3080,1820 3080,1860 2980,1960 2120,1960 2120,2100 2980,2100
+12VDC on Top Layer "+12VDC_L01_P011" (solid, pour order 11): 1040,3947 890,3947 890,3785 1040,3785
3V3 on Top Layer "3V3_L01_P010" (solid, pour order 10): 860,4015 875,4000 1020,4000 1020,3955 880,3955 850,3925 850,3715 750.5,3715 750.5,4015
+12VDC on Layer 2 (Vcc) (split plane): 3284.27,4476.53 3306.43,4472.12 3328.05,4465.56 3348.91,4456.92 3368.84,4446.27 3387.62,4433.72 3405.08,4419.39 3421.05,4403.42 3435.38,4385.96 3447.93,4367.17 3458.58,4347.25 3467.23,4326.38 3473.78,4304.77 3478.19,4282.61 3480.4,4260.13 3480.4,4248.84 3480.4,1448.84 3480.4,1437.54 3478.19,1415.06 3473.78,1392.91 3467.23,1371.29 3458.58,1350.42 3447.93,1330.5 3435.38,1311.72 3421.05,1294.26 3405.08,1278.29 3387.62,1263.96 3368.84,1251.41 3348.91,1240.76 3328.05,1232.11 3306.43,1225.56 3284.27,1221.15 3261.79,1218.93 739.21,1218.93 716.73,1221.15 694.57,1225.56 672.95,1232.11 652.09,1240.76 632.16,1251.41 613.38,1263.96 595.92,1278.29 579.95,1294.26 565.62,1311.72 553.07,1330.5 542.42,1350.42 533.77,1371.29 527.22,1392.91 522.81,1415.06 520.6,1437.54 520.6,1448.84 520.6,4248.84 520.6,4260.13 522.81,4282.61 527.22,4304.77 533.77,4326.38 542.42,4347.25 553.07,4367.17 565.62,4385.96 579.95,4403.42 595.92,4419.39 613.38,4433.72 632.16,4446.27 652.09,4456.92 672.95,4465.56 694.57,4472.12 716.73,4476.53 739.21,4478.74 3261.79,4478.74
GND on Layer 1 (GND) (split plane): 3284.27,4476.53 3306.43,4472.12 3328.05,4465.56 3348.91,4456.92 3368.84,4446.27 3387.62,4433.72 3405.08,4419.39 3421.05,4403.42 3435.38,4385.96 3447.93,4367.17 3458.58,4347.25 3467.23,4326.38 3473.78,4304.77 3478.19,4282.61 3480.4,4260.13 3480.4,4248.84 3480.4,1448.84 3480.4,1437.54 3478.19,1415.06 3473.78,1392.91 3467.23,1371.29 3458.58,1350.42 3447.93,1330.5 3435.38,1311.72 3421.05,1294.26 3405.08,1278.29 3387.62,1263.96 3368.84,1251.41 3348.91,1240.76 3328.05,1232.11 3306.43,1225.56 3284.27,1221.15 3261.79,1218.93 739.21,1218.93 716.73,1221.15 694.57,1225.56 672.95,1232.11 652.09,1240.76 632.16,1251.41 613.38,1263.96 595.92,1278.29 579.95,1294.26 565.62,1311.72 553.07,1330.5 542.42,1350.42 533.77,1371.29 527.22,1392.91 522.81,1415.06 520.6,1437.54 520.6,1448.84 520.6,4248.84 520.6,4260.13 522.81,4282.61 527.22,4304.77 533.77,4326.38 542.42,4347.25 553.07,4367.17 565.62,4385.96 579.95,4403.42 595.92,4419.39 613.38,4433.72 632.16,4446.27 652.09,4456.92 672.95,4465.56 694.57,4472.12 716.73,4476.53 739.21,4478.74 3261.79,4478.74

## Silkscreen, mask and mechanical layers (free items; w line width, h text height)
Top Overlay:
  text "GND" at 976.5,4391.5 h42
  text "GND" at 1531.5,4391.5 h42
  text "f1" at 946.5,4106.5 h42
  text "f2" at 1061.5,4106.5 h42
  text "P1" at 1291.5,4106.5 h42
  text "P6" at 1796.5,4106.5 h42
  text "3V3" at 913.5,3966.5 h42 r90
  text "O4" at 3433.5,3896.5 h42 r90
  text "GND" at 608.5,3811.5 h42 r90
  text "CF1" at 722.8,3213.21 h42
  text "O3" at 3438.5,3211.5 h42 r90
  text "CF2" at 722.8,3113.21 h42
  text "CP1" at 727.8,3013.21 h42
  text "CP2" at 727.8,2908.21 h42
  text "CP3" at 727.8,2813.21 h42
  text "CP4" at 727.8,2708.21 h42
  text "CP5" at 726.5,2611.5 h42
  text "CP6" at 726.5,2511.5 h42
  text "O2" at 3433.5,2486.5 h42 r90
  text "GND" at 726.5,2411.5 h42
  text "9V" at 726.5,2311.5 h42
  text "O4" at 556.5,1901.5 h42
  text "O3" at 556.5,1801.5 h42
  text "O1" at 3443.5,1781.5 h42 r90
  text "O2" at 561.5,1696.5 h42
  text "O1" at 566.5,1596.5 h42
  text "PEAK Hydroponics PDB" at 2176.5,1370.5 h42
  text "Oliver Hugh" at 2171.5,1290.5 h42
Mechanical 1:
  circle w0.5: c3300.5,4298.84 r72.5
  circle w0.5: c700.5,1398.84 r72.5
  circle w0.5: c3300.5,1398.84 r72.5
  circle w0.5: c700.5,4298.84 r72.5
  lines w0.5: 500.5,1448.84 ccw(c750.5,1448.84) 750.5,1198.84 3250.5,1198.84 ccw(c3250.5,1448.84) 3500.5,1448.84 3500.5,4248.84 ccw(c3250.5,4248.84) 3250.5,4498.84 750.5,4498.84 ccw(c750.5,4248.84) 500.5,4248.84 500.5,1448.84

## Text inside footprints (layer, text, board x,y; h text height)
D1: Mechanical 13 "+" at 1447.84,1895.62 h39.37 r180
D3: Mechanical 13 "+" at 2967.84,2125.62 h39.37 r180
D4: Mechanical 13 "+" at 2985.44,2875.62 h39.37 r180
D5: Mechanical 13 "+" at 2980.44,3550.62 h39.37 r180
J7: Top Overlay "12" at 1900,4300 h42; Top Overlay "1" at 1945,4200 h42; Top Overlay "1" at 1905,4200 h42; Top Overlay "1" at 1225,4200 h42; Top Overlay "2" at 1225,4300 h42
J8: Top Overlay "1" at 880,4200 h50; Top Overlay "2" at 870,4300 h50; Top Overlay "4" at 1150,4300 h50; Top Overlay "3" at 1150,4200 h50
J10: Top Overlay "6" at 720,4035 h50 r90; Top Overlay "5" at 820,4035 h50 r90; Top Overlay "2" at 720,3655 h50 r90; Top Overlay "1" at 820,3675 h50 r90
U1: Mechanical 13 "*" at 1020.25,3938.4 h50; Top Overlay "*" at 960,3985 h50
U2: Mechanical 13 "TAB" at 771.75,2076.5 h25 r180